# EAGLE board 00A-005 (EAGLE 6.3)
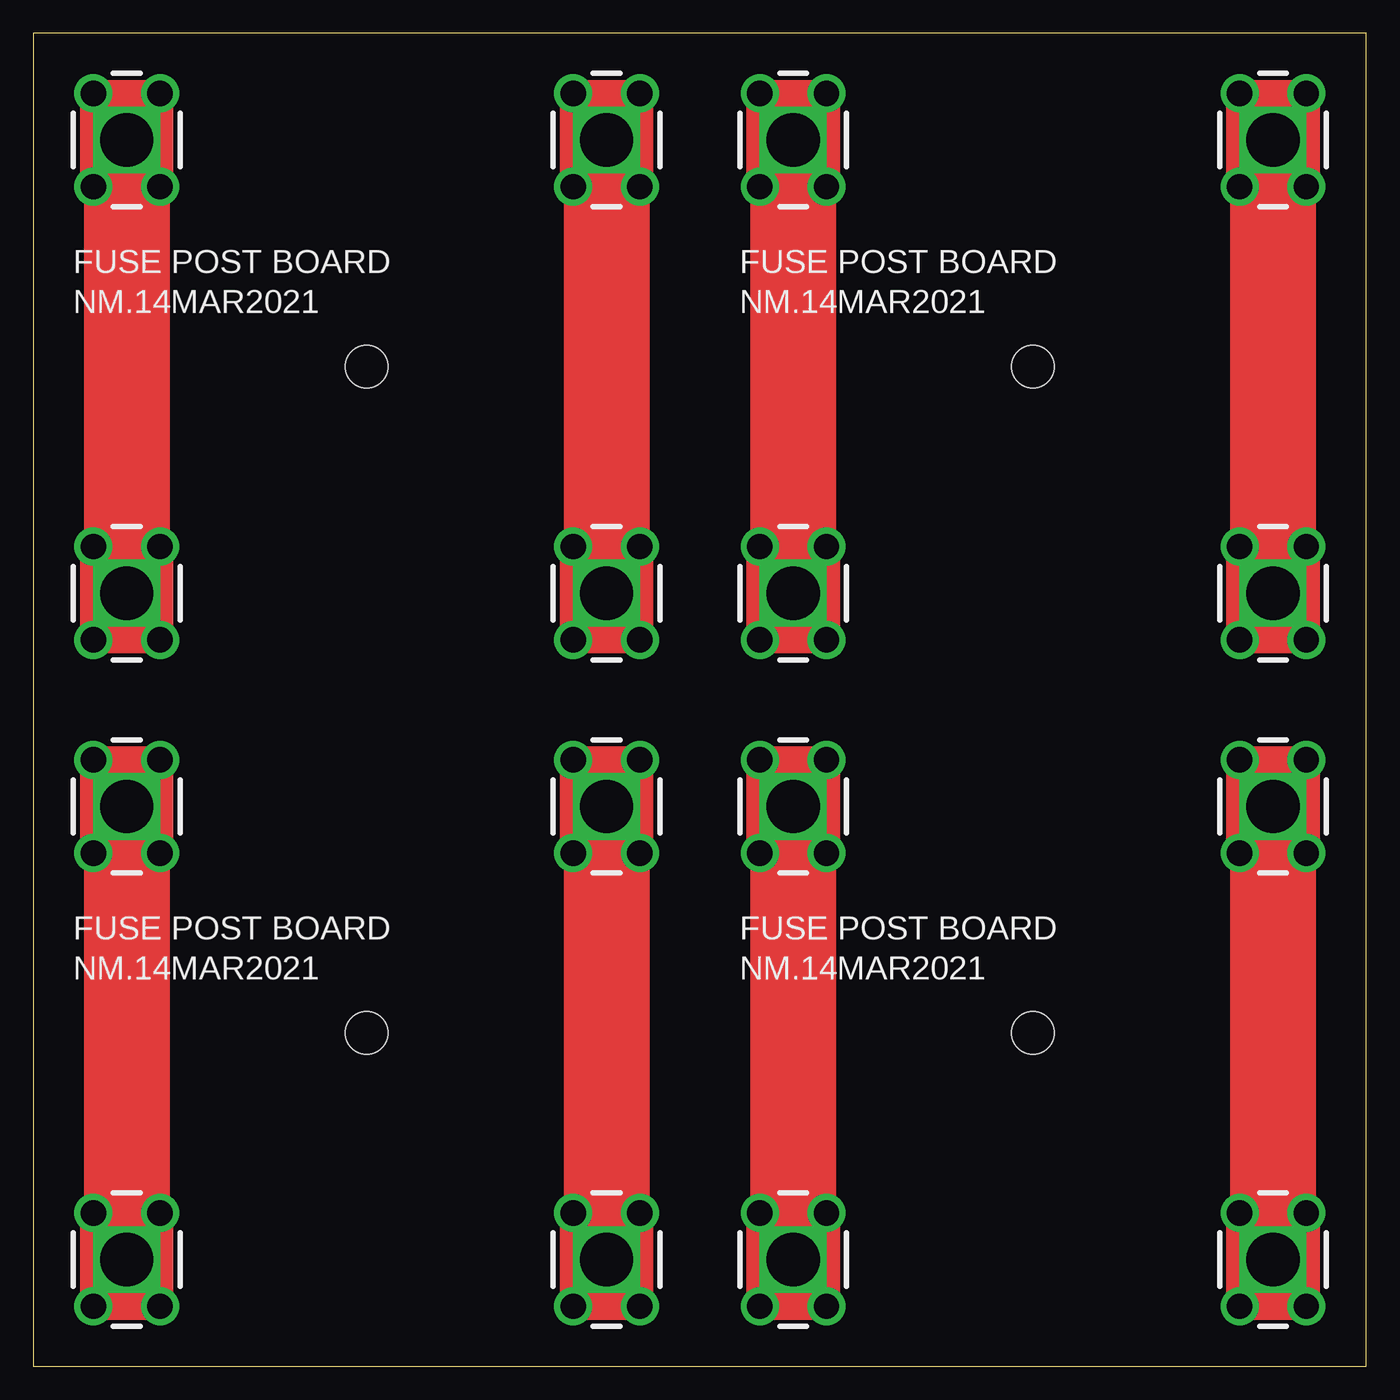
[diagram p0: board, top side]
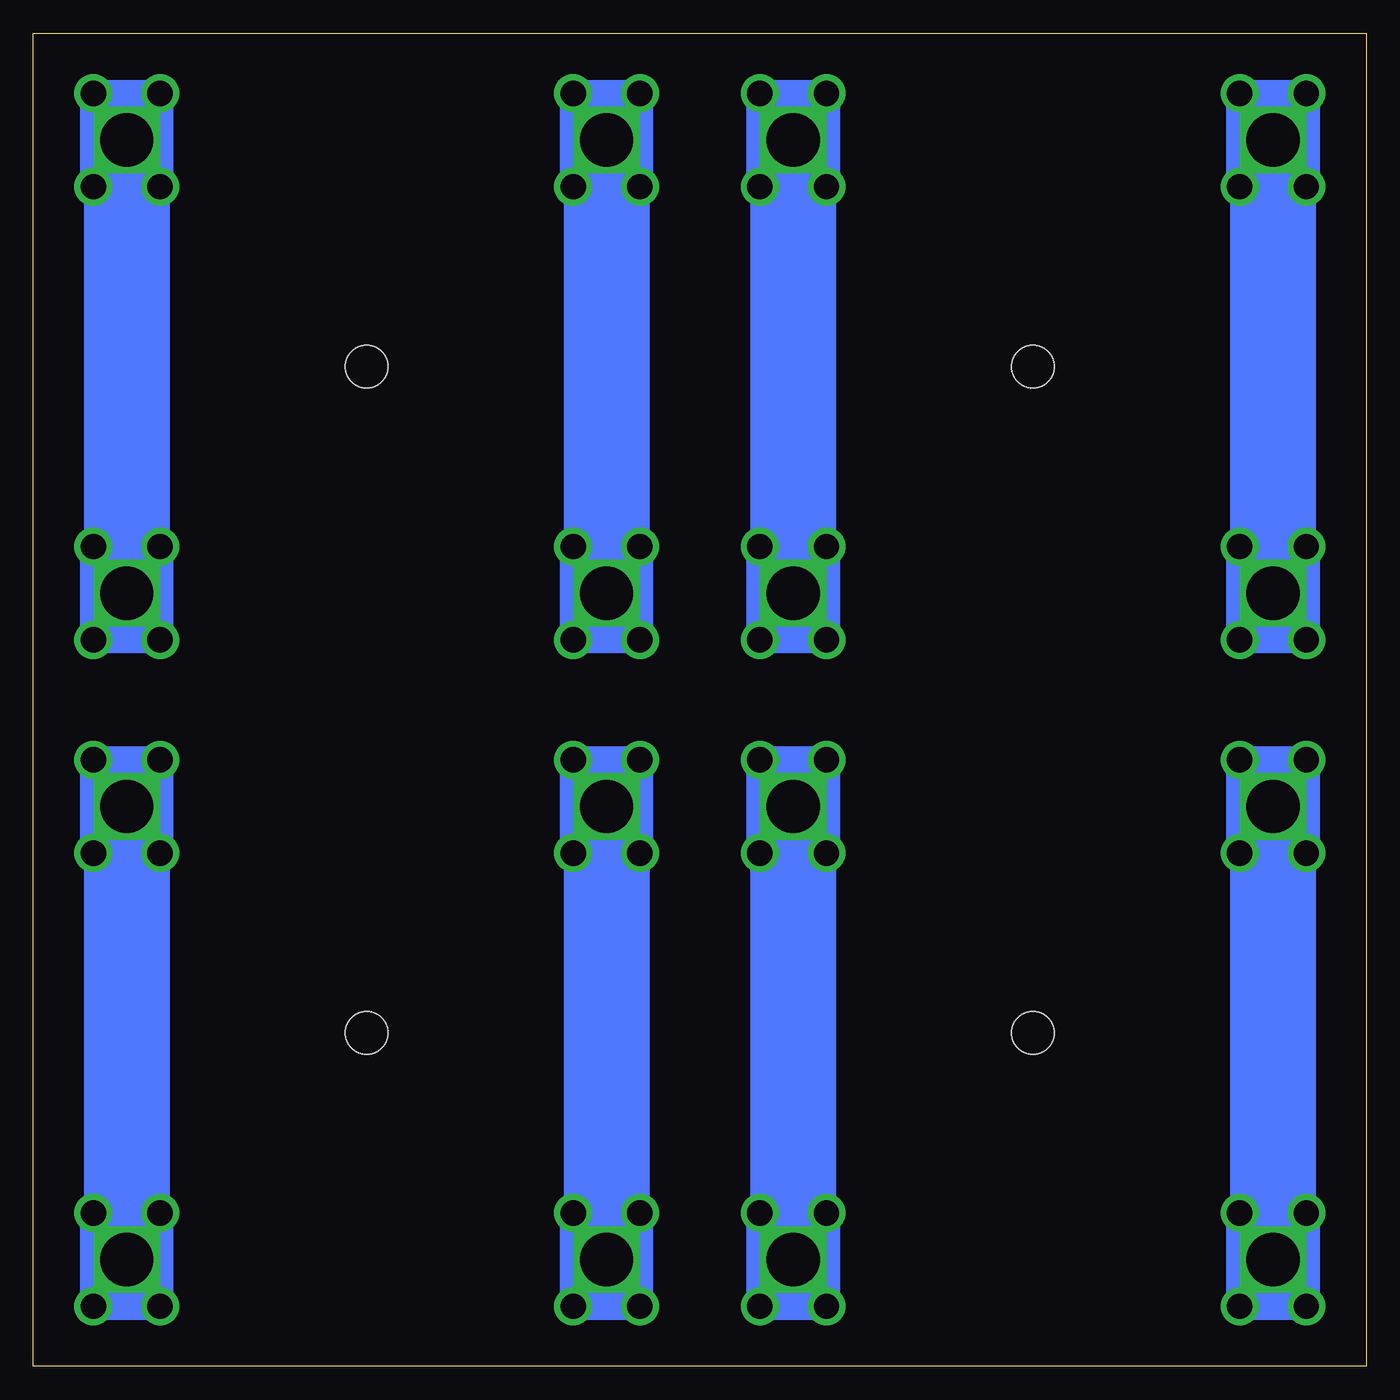
[diagram p1: board, bottom side, seen from below]

Size 100 x 100 mm. Coordinates in mm from the lower left corner, seen from the top.
Outline: 0,0 100,0 100,100 0,100 0,0
Copper layers (1*16): Top 0.035mm / dielectric 1.5mm / Bottom 0.035mm
Design rules "default": minimum track width 10mil, minimum drill 24mil, track to track 8mil, track to pad 8mil, pad to pad 8mil, via to via 8mil, smd to smd 8mil, copper to edge 40mil, drill to drill 8mil, minimum pad ring 10mil, minimum via ring 8mil, stop-mask expansion 4mil, vias tented up to drill 0mil, thermal gap 10mil
Holes 3.2 mm at 25,25 25,75 75,25 75,75

## Footprints (pad centres in the part's own frame; a part is rotated, then mirrored left to right if it is on the bottom)
SCREW_TERMINAL_M4 = drill 1.9: P$1 -2.5,3.5; P$2 2.5,3.5; P$3 -2.5,-3.5; P$4 2.5,-3.5 | drill 4 square: P$5 0,0

## Placement (x,y rotation side)
U$1  TESTPOINT2M4  [SCREW_TERMINAL_M4]  43,8 0 top
U$2  TESTPOINT2M4  [SCREW_TERMINAL_M4]  7,8 0 top
U$3  TESTPOINT2M4  [SCREW_TERMINAL_M4]  43,42 0 top
U$4  TESTPOINT2M4  [SCREW_TERMINAL_M4]  7,42 0 top
U$5  TESTPOINT2M4  [SCREW_TERMINAL_M4]  43,58 0 top
U$6  TESTPOINT2M4  [SCREW_TERMINAL_M4]  7,58 0 top
U$7  TESTPOINT2M4  [SCREW_TERMINAL_M4]  43,92 0 top
U$8  TESTPOINT2M4  [SCREW_TERMINAL_M4]  7,92 0 top
U$9  TESTPOINT2M4  [SCREW_TERMINAL_M4]  93,8 0 top
U$10  TESTPOINT2M4  [SCREW_TERMINAL_M4]  57,8 0 top
U$11  TESTPOINT2M4  [SCREW_TERMINAL_M4]  93,42 0 top
U$12  TESTPOINT2M4  [SCREW_TERMINAL_M4]  57,42 0 top
U$13  TESTPOINT2M4  [SCREW_TERMINAL_M4]  93,58 0 top
U$14  TESTPOINT2M4  [SCREW_TERMINAL_M4]  57,58 0 top
U$15  TESTPOINT2M4  [SCREW_TERMINAL_M4]  93,92 0 top
U$16  TESTPOINT2M4  [SCREW_TERMINAL_M4]  57,92 0 top

## Library data of the parts
U$1-U$16 = nolan

## Nets
N$1: U$1.P$5 U$3.P$5
N$2: U$2.P$5 U$4.P$5
N$3: U$5.P$5 U$7.P$5
N$4: U$6.P$5 U$8.P$5
N$5: U$9.P$5 U$11.P$5
N$6: U$10.P$5 U$12.P$5
N$7: U$13.P$5 U$15.P$5
N$8: U$14.P$5 U$16.P$5

## Tracks (layer width: path | path; a pad name or v marks a point on that pad's centre or on a via)
N$1
  Top 6.452: U$3.P$5 U$1.P$5
  Bottom 6.452: U$3.P$5 U$1.P$5
N$2
  Top 6.452: U$4.P$5 U$2.P$5
  Bottom 6.452: U$4.P$5 U$2.P$5
N$3
  Top 6.452: U$7.P$5 U$5.P$5
  Bottom 6.452: U$7.P$5 U$5.P$5
N$4
  Top 6.452: U$8.P$5 U$6.P$5
  Bottom 6.452: U$8.P$5 U$6.P$5
N$5
  Top 6.452: U$11.P$5 U$9.P$5
  Bottom 6.452: U$11.P$5 U$9.P$5
N$6
  Top 6.452: U$12.P$5 U$10.P$5
  Bottom 6.452: U$12.P$5 U$10.P$5
N$7
  Top 6.452: U$15.P$5 U$13.P$5
  Bottom 6.452: U$15.P$5 U$13.P$5
N$8
  Top 6.452: U$16.P$5 U$14.P$5
  Bottom 6.452: U$16.P$5 U$14.P$5

## Text on the board
tPlace: FUSE POST BOARD | FUSE POST BOARD | NM.14MAR2021 | NM.14MAR2021 | FUSE POST BOARD | FUSE POST BOARD | NM.14MAR2021 | NM.14MAR2021